# Altium PCB PC110.PcbDoc (part 10 of 24)
Units mm, origin at the board's own origin, x right, y up, seen from the top; angles counter-clockwise.
Board outline 150.05 x 107.35 mm, 10 copper layers (In2.Cu, F.Cu, B.Cu, In1.Cu, In3.Cu, In4.Cu, In5.Cu, In6.Cu, In7.Cu, In8.Cu); 936 components, 1434 nets, 4891 pads, 6088 vias.
Unrouted connection lines stored in the file: 2995.
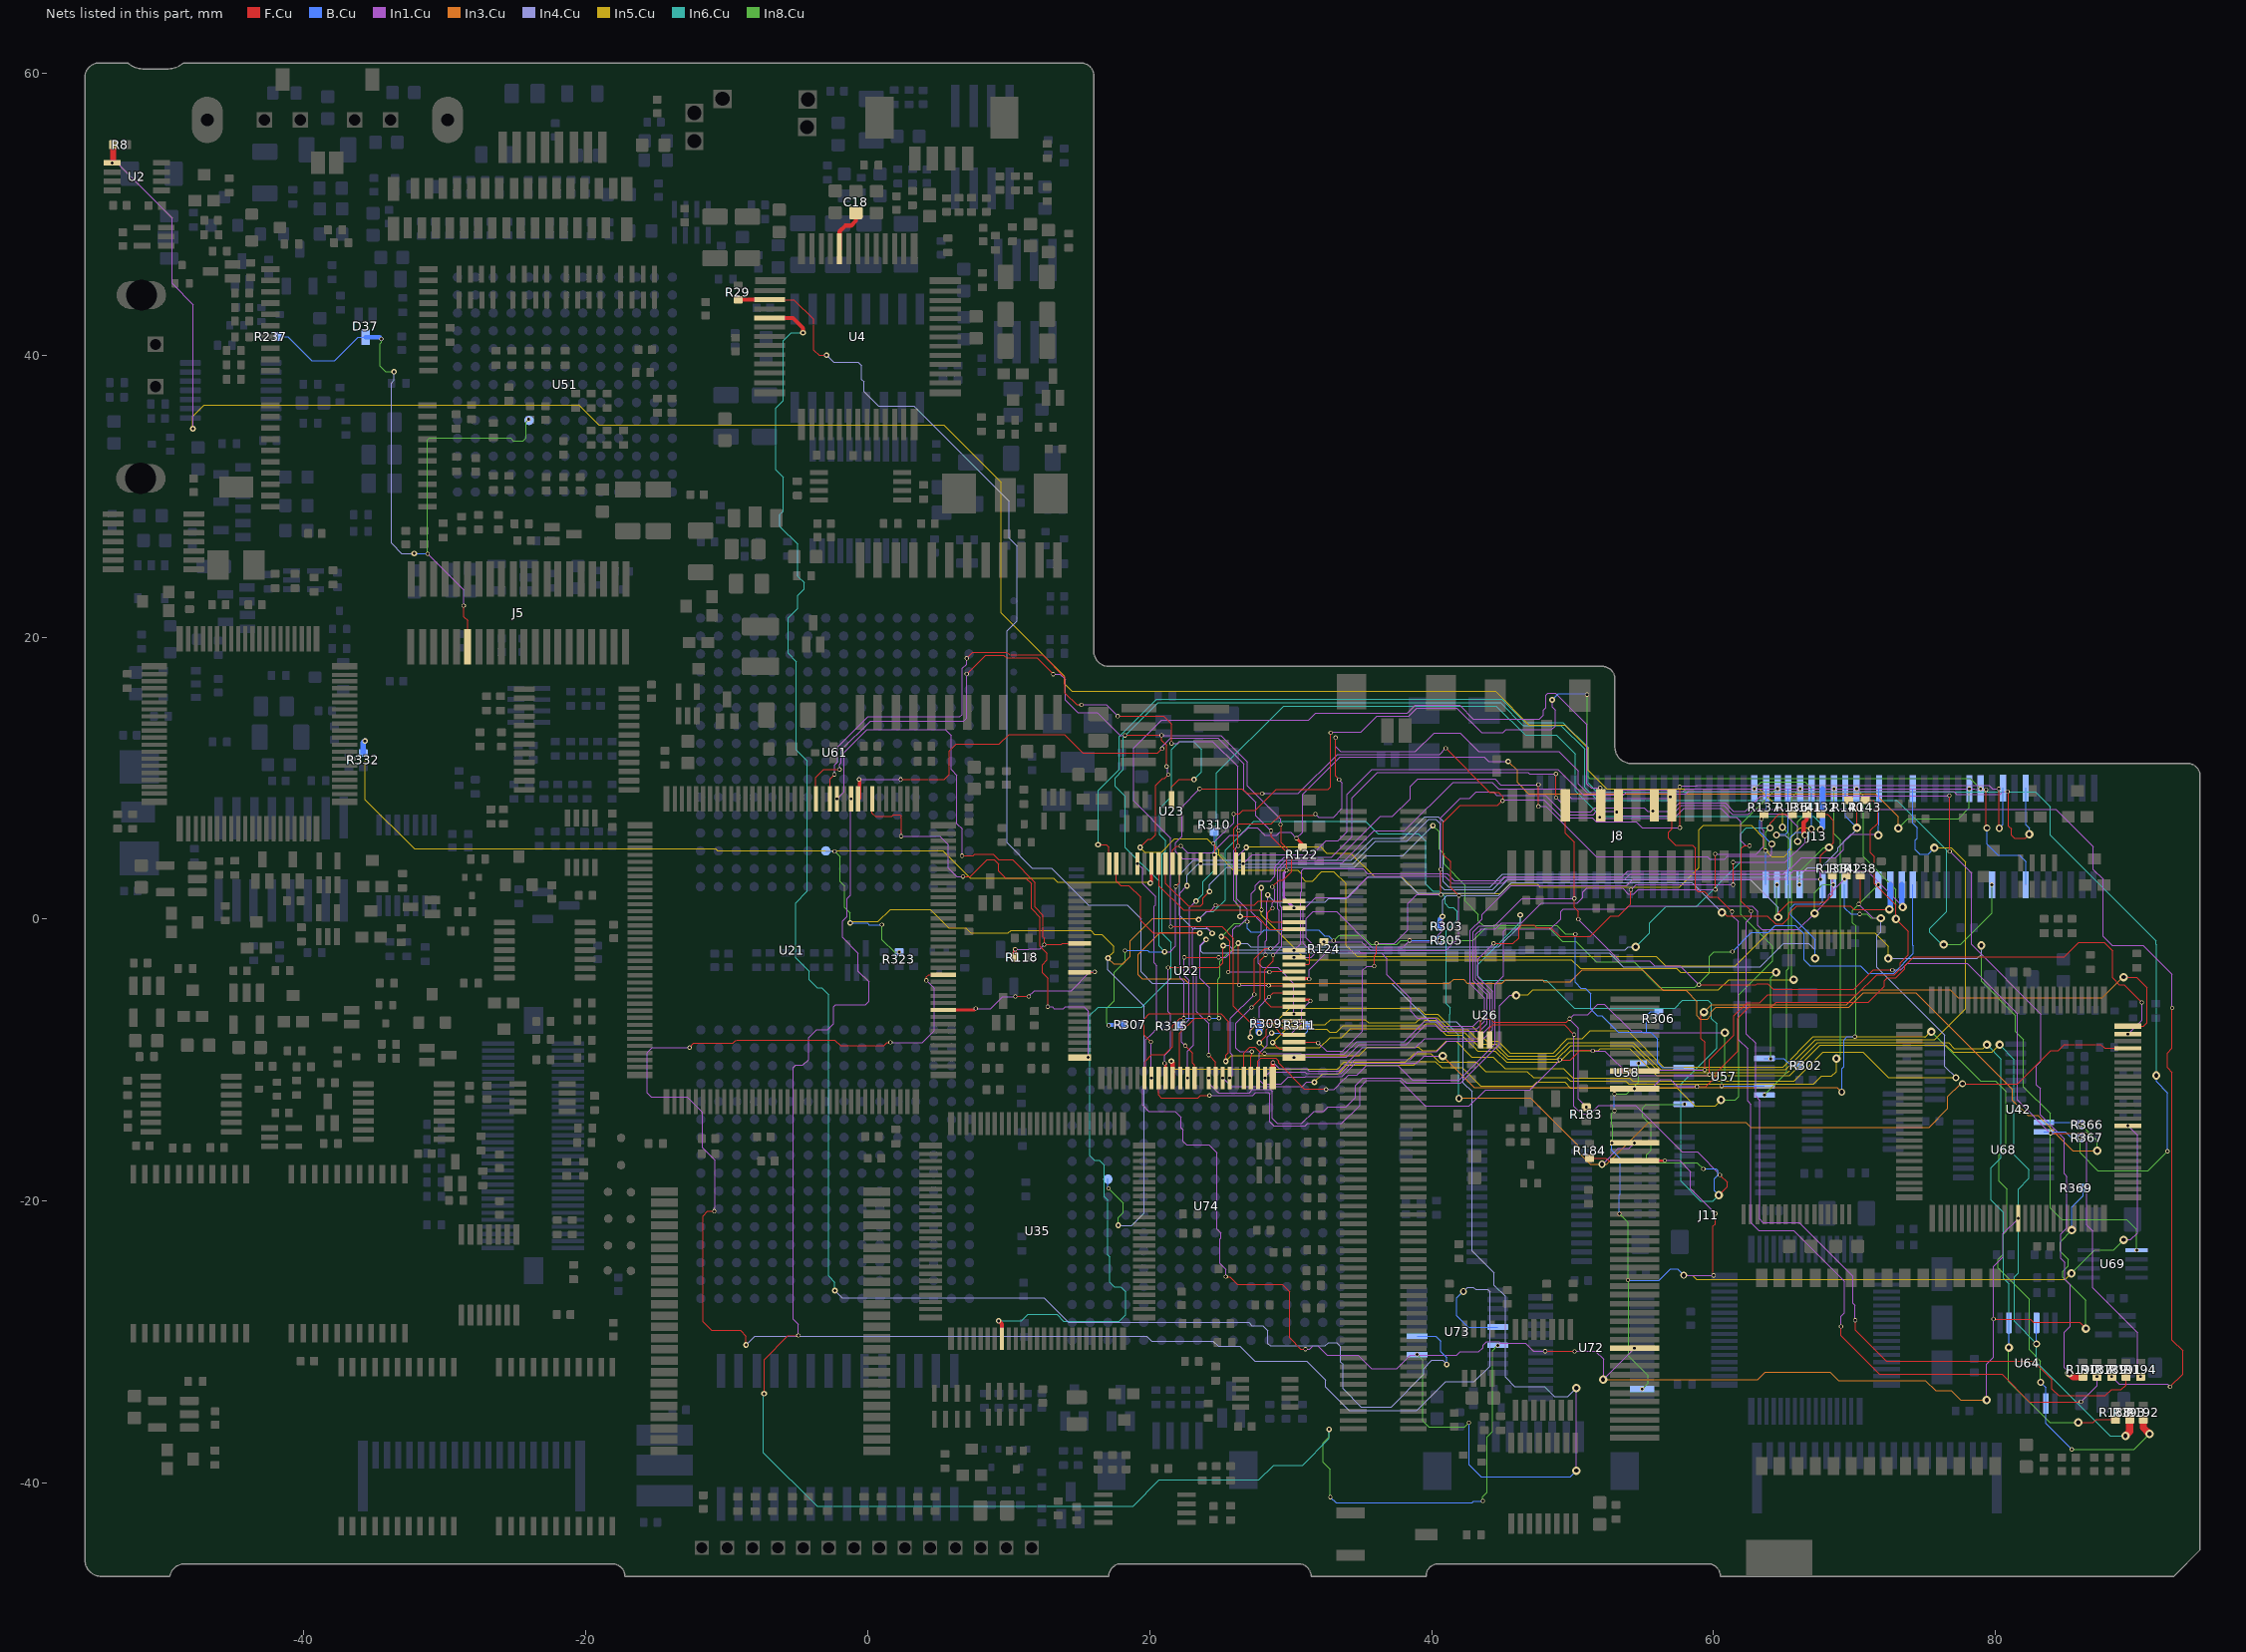
[diagram p17: the nets of this part, all layers, seen from the top]

## Via types
v1: diameter 0.3, hole 0.2, B.Cu to In8.Cu, tented both sides, 1934 vias
v2: diameter 0.4, hole 0.2, F.Cu to B.Cu, tented both sides, 1902 vias
v3: diameter 0.3, hole 0.2, F.Cu to In1.Cu, tented both sides, 1729 vias
v4: diameter 0.6, hole 0.3, F.Cu to B.Cu, tented both sides, 354 vias
v5: diameter 0.5, hole 0.3, F.Cu to B.Cu, tented both sides, 136 vias
v6: diameter 0.4, hole 0.2, B.Cu to In8.Cu, tented both sides, 12 vias
v7: diameter 0.3, hole 0.2, F.Cu to B.Cu, tented both sides, 6 vias
v8: diameter 0.6, hole 0.2, F.Cu to B.Cu, tented both sides, 4 vias
v9: diameter 0.5, hole 0.2, B.Cu to In8.Cu, tented both sides, 3 vias
v10: diameter 0.5, hole 0.2, F.Cu to B.Cu, tented both sides, 2 vias
v11: diameter 0.4, hole 0.3, F.Cu to B.Cu, tented both sides, 2 vias
v12: diameter 0.3, hole 0.2, F.Cu to In4.Cu, tented both sides, 2 vias
v13: diameter 0.6, hole 0.3, B.Cu to In8.Cu, tented both sides, 1 vias
v14: diameter 0.3, hole 0.2, F.Cu to In3.Cu, tented both sides, 1 vias

## Nets (pads, with @x,y where several pads share a name; then routed paths per layer and width w, separated by ;. In a path a pad name is that pad's centre, name@x,y a point inside that pad or via, vN(x,y) a via of type N, cw(c..) or ccw(c..) an arc to the next point about the centre after c; other vN are vias at no path point) (continued)
ESS_IRQ1: R29.1 U4.16 U73.13 | length 149.4
  F.Cu w0.08: U4.16@-6.95,43.94 -5.23,43.94 -3.83,42.54 -3.83,40.37 -3.46,40 v2(-2.92,40)
  F.Cu w0.3: R29.1@-9.2,43.94 U4.16@-6.95,43.94
  In1.Cu w0.08: v4(50.26,-33.26) 50.27,-33.27 v4(50.27,-39.11)
  In4.Cu w0.08: v2(-2.92,40) -2.43,39.51 -0.68,39.51 -0.43,39.26 -0.43,38.28 -0.27,38.12 -0.27,37.42 0.75,36.4 3.27,36.4 10.04,29.63 10.04,27.03 10.61,26.46 10.61,21.17 9.9,20.46 9.9,5.41 11.67,3.64 13.04,3.64 15.66,1.02 18.39,1.02 19.38,0.03 19.38,-3.74 20.18,-4.54 20.57,-4.54 20.575,-4.535 37.135,-4.535 39.87,-7.27 41.75,-7.27 42.25,-7.77 42.25,-11.6 42.88,-12.23 42.88,-23.54 44.44,-25.1 44.44,-25.96 45.23,-26.75 45.23,-32.49 45.895,-33.155 48.005,-33.155 48.72,-33.87 49.65,-33.87 v4(50.26,-33.26)
  In8.Cu w0.08: v1(38.967,-30.875) 39.38,-31.287 39.38,-35.6 39.78,-36 42.36,-36 v1(42.65,-35.71)
  B.Cu w0.08: v1(42.65,-35.71) 42.65,-38.69 43.51,-39.55 49.83,-39.55 v4(50.27,-39.11)
ESS_IRQ1_Buf: U21.118 U73.7 | length 125.4
  F.Cu w0.08: v2(-7.35,-33.65) -7.35,-31.23 -5.67,-29.55 -4.94,-29.55 v3(-4.92,-29.53)
  In1.Cu w0.08: v3(-4.92,-29.53) -4.92,-28.74 -5.27,-28.39 -5.27,-10.515 -5.11,-10.355 -4.595,-10.355 -4.18,-9.94 -4.18,-8.39 -3.63,-7.84 -2.85,-7.84 -2.43,-7.42 -2.43,-6.2 -2.29,-6.06 -0.15,-6.06 0.08,-5.83 0.08,-4.45 -0.67,-3.7 -0.67,-2.42 -1.79,-1.3 -1.79,-0.13 -1.48,0.18 -1.48,1.47 -1.22,1.73 -1.22,8.39 ; v3(-1.18,8.535) -1.22,8.495 -1.22,8.39 ; v3@-1.17,8.47 -1.22,8.42 -1.22,8.39
  In6.Cu w0.08: v2(-7.35,-33.65) -7.39,-33.69 -7.39,-37.84 -3.6,-41.63 18.82,-41.63 20.68,-39.77 27.75,-39.77 28.8,-38.72 30.84,-38.72 32.72,-36.84 v2(32.72,-36.18)
  In8.Cu w0.08: v2(32.72,-36.18) 32.72,-36.72 32.3,-37.14 32.3,-38.52 32.81,-39.03 v1(32.81,-40.99) ; v1(43.63,-41.27) 43.63,-40.97 43.94,-40.66 43.94,-36.71 44.32,-36.33 44.32,-30.598 v1(44.692,-30.225)
  B.Cu w0.08: v1(32.81,-40.99) 33.22,-41.4 42.86,-41.4 42.99,-41.27 v1(43.63,-41.27)
ESS_IRQ2: U4.18 U73.15 | length 130.5
  F.Cu w0.3: U4.18@-6.95,42.64 -5.31,42.64 -4.59,41.92 v2(-4.59,41.6)
  In4.Cu w0.08: v2(-2.33,-26.34) -1.82,-26.85 12.5,-26.85 14.25,-28.6 27.04,-28.6 27.26,-28.82 28.01,-28.82 28.38,-29.19 28.38,-30.09 28.54,-30.25 32.46,-30.25 32.68,-30.03 33.27,-30.03 33.55,-30.31 33.55,-31.41 33.71,-31.57 33.71,-33.3 35,-34.59 37.13,-34.59 39.45,-32.27 39.45,-31.86 40.02,-31.29 40.78,-31.29 v2(41.07,-31.58)
  In6.Cu w0.08: v2(-4.59,41.6) -5.44,41.6 -6,41.04 -6,36.77 -6.53,36.24 -6.53,31.87 -5.99,31.33 -5.99,28.94 -6.22,28.71 -6.22,27.85 -4.96,26.59 -4.96,24.32 -4.51,23.87 -4.51,23.41 -4.96,22.96 -4.96,22.05 -5.65,21.36 -5.65,18.86 -5.06,18.27 -5.06,11.99 -4.29,11.22 -4.29,1.98 -5.11,1.16 -5.11,-2.73 -4.16,-3.68 -4.16,-4.31 -3.6,-4.87 -3.26,-4.87 -2.78,-5.35 -2.78,-25.31 -2.33,-25.76 v2(-2.33,-26.34)
  B.Cu w0.08: U73.15@38.967,-29.575 40.285,-29.575 40.65,-29.94 40.65,-30.68 41.07,-31.1 v2(41.07,-31.58)
ESS_IRQ2_Buf: U21.87 U73.5 | length 123.4
  F.Cu w0.08: v3(-12.64,-9.1) -12.34,-8.8 -9.57,-8.8 -9.39,-8.62 -9.35,-8.62 -9.29,-8.56 -2.33,-8.56 -1.94,-8.95 1.17,-8.95 1.38,-8.74 v3(1.61,-8.74) ; v3(-10.89,-20.71) -11.35,-20.71 -11.68,-21.04 -11.68,-28.55 -11.08,-29.15 -9.04,-29.15 -8.63,-29.56 v2(-8.63,-30.2) ; v3(4.16,-4.34) 4.16,-4.1 4.32,-3.94 U21.87@5.37,-3.94
  In1.Cu w0.08: v3(-12.64,-9.1) -12.65,-9.09 -15.29,-9.09 -15.65,-9.45 -15.65,-12.31 -15.37,-12.59 -12.81,-12.59 -11.71,-13.69 -11.71,-16.22 -10.82,-17.11 -10.82,-20.41 -10.89,-20.48 v3(-10.89,-20.71) ; v3(1.61,-8.74) 3.89,-8.74 4.72,-7.91 4.72,-4.9 v3(4.16,-4.34)
  In4.Cu w0.08: v2(-8.63,-30.2) -8,-29.57 19.78,-29.57 20.15,-29.94 24.5,-29.94 24.86,-30.3 26.4,-30.3 27.46,-31.36 31.15,-31.36 32.48,-32.69 32.48,-33.2 34.135,-34.855 38.965,-34.855 41.01,-32.81 43.02,-32.81 44.14,-31.69 44.14,-26.43 43.98,-26.27 43.11,-26.27 42.95,-26.11 42.54,-26.11 v5(42.25,-26.4)
  B.Cu w0.08: v5(42.25,-26.4) 41.78,-26.87 41.78,-28.12 42.585,-28.925 U73.5@44.693,-28.925
ESS_Sound: C18.1 U4.9 | length 3.3
  F.Cu w0.3: U4.9@-2,47.54 -2,48.77 -1.58,49.19 -1.18,49.19 -0.84,49.53 C18.1@-0.84,50.085
F65_ENAVEE: D37.3 J5.26 R237.1 U51.E9 | length 52.4
  F.Cu w0.08: v3(-28.66,22.23) -28.66,21.46 -28.38,21.18 J5.26@-28.38,19.33
  In1.Cu w0.08: v2(-32.17,25.94) -31.24,25.94 -28.66,23.36 v3(-28.66,22.23)
  In4.Cu w0.08: v2(-33.6,38.83) -33.6,38.22 -33.79,38.03 -33.79,26.67 -33.06,25.94 v2(-32.17,25.94)
  In8.Cu w0.08: v1(-34.5,41.16) -34.5,40.92 -34.6,40.82 -34.6,39.24 -34.19,38.83 v2(-33.6,38.83) ; v1(-31.22,25.91) -31.22,33.98 -31.08,34.12 -25.34,34.12 -25.15,33.93 -24.46,33.93 -24.25,34.14 -24.25,35.26 v1(-24.06,35.45)
  B.Cu w0.08: R237.1@-41.82,41.33 -41.13,41.33 -39.42,39.62 -37.8,39.62 -36.14,41.28 D37.3@-35.61,41.28 ; v2(-32.17,25.94) -31.25,25.94 v1(-31.22,25.91)
  B.Cu w0.3: D37.3@-35.61,41.28 -34.62,41.28 v1(-34.5,41.16)
FCS_BVD1: J11.42 U42.50 | length 46.5
  F.Cu w0.08: v4(59.31,-6.58) 59.11,-6.78 59.11,-8.465 59.37,-8.725 v3(59.37,-10.69) ; v4(89.08,-4.11) 89.99,-4.11 90.75,-4.87 90.75,-7.34 90.515,-7.575 U42.50@89.385,-7.575
  In1.Cu w0.08: v3(54.39,-10.78) 54.48,-10.69 v3(59.37,-10.69)
  In3.Cu w0.08: v4(59.31,-6.58) 59.83,-6.06 69.43,-6.06 70.47,-5.02 76.77,-5.02 77.33,-5.58 87.56,-5.58 89.03,-4.11 v4(89.08,-4.11)
FCS_BVD2: J11.40 U42.49 | length 48.1
  F.Cu w0.08: v3(58.82,-11.87) 59.45,-11.87 60.175,-11.145 60.175,-10.895 61.73,-9.34 61.73,-7.02 62.54,-6.21 64.13,-6.21 64.45,-5.89 70.98,-5.89 72.12,-4.75 72.12,-4.35 72.32,-4.15 72.93,-4.15 73.56,-3.52 73.56,-3.31 74.2,-2.67 84.87,-2.67 85.89,-1.65 87.7,-1.65 88.3,-2.25 88.3,-4.17 88.77,-4.64 89.11,-4.64 v3(90.38,-5.91)
  In1.Cu w0.08: v3(54.39,-12.03) 55.56,-12.03 56.23,-11.36 56.93,-11.36 57.44,-11.87 v3(58.82,-11.87) ; v3(89.385,-8.15) 90.38,-7.155 v3(90.38,-5.91)
FCS_IOCHRDY: J11.34 R323.2 U22.98 U42.47 U61.H14 U74.K3 | length 172.6
  F.Cu w0.08: v3(24.69,0.99) 27.42,0.99 27.72,1.29 U22.98@30.23,1.29 ; v5(77.66,-11.67) 81.57,-11.67 83.91,-9.33 84.44,-9.33 84.88,-8.89 87.47,-8.89 87.73,-9.15 U42.47@89.385,-9.15
  In1.Cu w0.08: v2(23.47,-0.03) 23.48,-0.03 24.07,0.56 24.26,0.56 v3(24.69,0.99) ; v5(52.08,-17.38) 52.12,-17.38 53.24,-16.26 54.01,-16.26 v3(54.39,-15.88)
  In3.Cu w0.08: v2(17.04,-2.76) 17.44,-3.16 18.1,-3.16 18.63,-2.63 18.63,-1.53 20.22,0.06 23.22,0.06 23.31,-0.03 v2(23.47,-0.03) ; v5(41.93,-12.71) 41.97,-12.67 47.02,-12.67 50.51,-16.16 50.51,-16.63 51.26,-17.38 v5(52.08,-17.38) 52.43,-17.38 55.4,-14.41 62.3,-14.41 62.64,-14.75 75.29,-14.75 76.61,-13.43 76.61,-12.58 77.52,-11.67 v5(77.66,-11.67)
  In4.Cu w0.08: v2(17.04,-2.76) 17.04,-3.6 19.6,-6.16 19.6,-20.84 18.73,-21.71 v2(17.77,-21.71)
  In5.Cu w0.08: v2(-1.24,-0.27) -1.14,-0.17 0.74,-0.17 1.61,0.7 4.45,0.7 5.76,-0.61 6.94,-0.61 7.32,-0.99 9.97,-0.99 10.17,-0.79 15.81,-0.79 16.09,-1.07 16.59,-1.07 17.44,-1.92 17.44,-2.32 17.04,-2.72 v2(17.04,-2.76)
  In6.Cu w0.08: v2(23.47,-0.03) 24.03,0.53 24.52,0.53 25.36,1.37 25.36,4.91 27.4,6.95 35.32,6.95 36.19,6.08 39.045,6.08 39.59,5.535 39.59,2.48 40.07,2 40.525,2 40.95,1.575 40.95,1.1 41.21,0.84 41.52,0.84 41.82,0.54 41.82,-0.07 41.05,-0.84 41.05,-6 41.31,-6.26 41.31,-6.69 41.27,-6.73 41.27,-7.57 41.93,-8.23 v5(41.93,-12.71)
  In8.Cu w0.08: v1(-2.35,4.81) -1.96,4.42 -1.96,2.67 -1.63,2.34 -1.63,0.82 -1.24,0.43 v2(-1.24,-0.27) ; v1(1.005,-0.391) 1.005,-1.455 1.88,-2.33 v1(2.23,-2.33) ; v1(17.08,-19.09) 18.12,-20.13 18.12,-20.81 17.77,-21.16 v2(17.77,-21.71)
  B.Cu w0.08: U61.H14@-2.98,4.84 -2.38,4.84 v1(-2.35,4.81) ; v2(-1.24,-0.27) -0.02,-0.27 0.101,-0.391 v1(1.005,-0.391) ; U74.K3@17.03,-18.42 17.03,-19.04 v1(17.08,-19.09)
FCS_RESET: J11.32 R184.1 U42.36 U58.4 U72.11 | length 89.7
  F.Cu w0.08: R184.1@51.22,-16.98 51.26,-16.94 52.36,-16.94 52.55,-17.13 J11.32@54.39,-17.13 ; v3(60.01,-25.26) 59.96,-25.21 59.96,-21.78 60.13,-21.61 v3(60.13,-20.88)
  F.Cu w0.2: R184.1@51.21,-16.99 R184.1@51.22,-16.98 ; J11.32@54.39,-17.13 56.51,-17.13 v3(56.53,-17.11)
  In1.Cu w0.08: v3(56.53,-17.11) 57.57,-17.11 58.36,-17.9 58.36,-19.11 v3(60.13,-20.88) ; v5(57.88,-25.26) v3(60.01,-25.26) ; v4(89.09,-22.74) 89.1,-22.73 89.59,-22.73 90.07,-22.25 90.07,-15.34 89.385,-14.655 v3(89.385,-14.65)
  In5.Cu w0.08: v5(57.88,-25.26) 58.49,-25.26 58.77,-25.54 84.96,-25.54 v4(85.38,-25.12)
  In8.Cu w0.08: v1(52.79,-15.88) 52.79,-15.65 52.84,-15.6 52.84,-14.6 52.78,-14.54 52.78,-13.79 v1(52.97,-13.6) ; v1(52.96,-12.39) 53.82,-12.39 54.68,-11.53 v1(54.68,-10.22) ; v1(53.32,-20.89) 53.93,-21.5 v1(53.93,-25.6) 53.98,-25.65 53.98,-30.98 55.36,-32.36 55.36,-32.895 v1(54.93,-33.325) ; v4(85.38,-25.12) 87.05,-23.45 88.38,-23.45 v4(89.09,-22.74)
  B.Cu w0.08: v1(52.79,-15.88) 52.79,-16.4 53.39,-17 53.39,-19.5 53.32,-19.57 v1(53.32,-20.89) ; v1(52.96,-12.39) 52.96,-13.59 v1(52.97,-13.6) ; v1(53.93,-25.6) 56.14,-25.6 56.95,-24.79 57.43,-24.79 57.88,-25.24 v5(57.88,-25.26)
FDC_ACK#: J13.71 R136.1 U22.60 | length 63.8
  F.Cu w0.08: v3(21.3,-3.43) 24.88,-3.43 25.21,-3.1 v2(25.21,-1.87) ; v5(64,6.47) 64,6.81 64.62,7.43 R136.1@65.6,7.43
  F.Cu w0.2: v3(21.06,-10.22) 21.13,-10.29 U22.60@21.13,-11.26
  In1.Cu w0.08: v3(21.06,-10.22) 21.06,-9.63 21.48,-9.21 21.48,-6.74 21.3,-6.56 v3(21.3,-3.43)
  In4.Cu w0.08: v2(25.21,-1.87) 25.63,-1.87 25.94,-2.18 53.73,-2.18 53.94,-1.97 v4(54.47,-1.97)
  In6.Cu w0.08: v4(54.47,-1.97) 55.46,-0.98 55.46,-0.26 56.62,0.9 58.77,0.9 61.94,4.07 61.94,6.08 62.33,6.47 v5(64,6.47)
  In8.Cu w0.08: v1(63.69,4.86) 63.69,6.17 63.99,6.47 v5(64,6.47)
  B.Cu w0.08: J13.71@63.69,2.45 v1(63.69,4.86)
FDC_AUTOFD#: J13.73 R141.1 U22.74 | length 59.2
  F.Cu w0.08: v3(44.39,-1.71) 45.79,-1.71 46.19,-1.31 46.19,-0.65 46.42,-0.42 47.27,-0.42 47.42,-0.57 48.44,-0.57 49.09,-1.22 51.246,-1.22 52.686,0.22 53.26,0.22 54.13,1.09 v3(54.13,2.08) ; v3(61.39,2.45) v3(61.39,4.05)
  F.Cu w0.3: v5(66.48,5.96) 66.38,6.06 66.38,6.85 66.61,7.08 R141.1@66.61,7.43
  In1.Cu w0.08: v3(28.18,-11.26) 28.18,-11.16 28.51,-10.83 31.01,-10.83 31.12,-10.94 33.57,-10.94 34.56,-9.95 38.48,-9.95 38.84,-9.59 38.84,-9.56 39.02,-9.38 40.38,-9.38 41.11,-8.65 43.51,-8.65 44.31,-7.85 44.31,-5.12 43.3,-4.11 43.3,-2.8 v3(44.39,-1.71) ; v3(54.13,2.08) 54.5,2.45 v3(61.39,2.45) ; v3(61.39,4.05) 65.09,4.05 66.48,5.44 v5(66.48,5.96)
  B.Cu w0.08: J13.73@65.29,2.45 65.29,4.88 65.48,5.07 65.48,5.85 65.81,6.18 66.26,6.18 v5(66.48,5.96)
FDC_BUSY: J13.22 R143.2 U22.59 | length 90.6
  F.Cu w0.08: U22.59@20.63,-11.26 20.63,-12.48 20.82,-12.67 23.43,-12.67 23.6,-12.5 v3(24.24,-12.5) ; v3(49.09,-9.98) 49.84,-9.98 50.53,-9.29 51.38,-9.29 v3(51.43,-9.34) ; v3(59.7,-11.01) 59.7,-9.96 61.45,-8.21 61.45,-6.86 62.39,-5.92 63.27,-5.92 63.83,-5.36 70.14,-5.36 71.57,-3.93 72.83,-3.93 73.245,-3.515 73.245,-3.095 73.81,-2.53 73.81,-0.86 v4(72.94,0.01) 72.94,1.01 71.42,2.53 71.42,4.45 71.14,4.73 71.14,6.31 71.64,6.81 71.64,8.1 71.3,8.44 R143.2@70.76,8.44
  In1.Cu w0.08: v3(24.24,-12.5) 27.32,-12.5 27.53,-12.29 28.4,-12.29 28.51,-12.4 28.51,-14.37 28.81,-14.67 31.02,-14.67 31.2,-14.49 33.61,-14.49 34.91,-13.19 34.91,-11.92 35.38,-11.45 37.75,-11.45 39.55,-13.25 42.67,-13.25 43.82,-12.1 46.97,-12.1 v3(49.09,-9.98) ; v3(51.43,-9.34) 52.29,-9.34 54.05,-11.1 59.61,-11.1 v3(59.7,-11.01)
  In8.Cu w0.08: v1(70.14,9.25) 70.63,8.76 70.63,4.43 72.94,2.12 v4(72.94,0.01)
FDC_CLK: R332.2 U22.18 | length 64.6
  F.Cu w0.2: v2(20.04,2.56) 20.13,2.65 U22.18@20.13,3.94
  In5.Cu w0.08: v2(-35.66,12.64) -35.64,12.62 -35.64,8.48 -32.17,5.01 -10.78,5.01 -10.64,4.87 5.31,4.87 7.27,2.91 13.18,2.91 13.46,2.63 19.97,2.63 v2(20.04,2.56)
  B.Cu w0.4: R332.2@-35.79,11.79 -35.79,12.51 v2(-35.66,12.64)
FDC_CTS1#: J8.8 R191.1 U22.80 | length 147.1
  F.Cu w0.08: v3(21.5,-0.53) 25.12,-0.53 25.94,-1.35 25.94,-6.16 27.17,-7.39 29.02,-7.39 29.34,-7.71 U22.80@30.23,-7.71 ; v3(51.93,7.23) 51.93,8.02 J8.8@51.99,8.08 51.96,8.11 v3(51.96,9.31) ; v3(62.55,5.21) 62.16,5.21 61.97,5.02 61.97,1.26 v3(62.66,0.57) ; v3(70.05,-28.45) 70.05,-29.15 72.24,-31.34 82.67,-31.34 84,-32.67 84,-33.31 84.49,-33.8 87.79,-33.8 88.22,-33.37 88.91,-33.37 89.25,-33.03 R191.1@89.25,-32.445
  In1.Cu w0.08: v3(21.5,-0.53) 21.5,5.76 18.87,8.39 18.87,12.13 20.86,14.12 31.29,14.12 31.78,14.61 38.26,14.61 38.83,15.18 41.98,15.18 42.96,14.2 47.64,14.2 47.92,14.48 47.92,14.84 48.1,15.02 48.1,15.89 48.25,16.04 48.79,16.04 51.02,13.81 51.02,9.61 51.32,9.31 v3(51.96,9.31) ; v3(51.93,7.23) 52.01,7.15 57.2,7.15 57.9,7.85 60.53,7.85 61.14,7.24 61.61,7.24 61.94,6.91 61.94,5.56 62.29,5.21 v3(62.55,5.21) ; v3(62.66,0.57) 62.66,0.16 62.32,-0.18 62.32,-8.14 62.98,-8.8 62.98,-12.55 63.27,-12.84 63.27,-21.28 63.49,-21.5 66.07,-21.5 69.9,-25.33 69.9,-27.25 70.03,-27.38 70.03,-28.43 v3(70.05,-28.45)
FDC_CTS2#: J13.82 R303.2 U22.90 | length 54.8
  F.Cu w0.08: v4(60.59,0.47) 60.72,0.47 60.95,0.24 63.8,0.24 64.39,-0.35 64.9,-0.35 65.37,0.12 65.37,0.44 65.88,0.95 69.72,0.95 69.97,0.7 v4(72.47,0.7)
  In1.Cu w0.08: v3(30.23,-2.71) 31.47,-2.71 31.68,-2.5 31.68,-1.9 31.1,-1.32 31.1,0.04 31.6,0.54 33.24,0.54 35.81,-2.03 37.94,-2.03 38.36,-1.61 39.94,-1.61 40.77,-0.78 v2(40.77,0.19)
  In4.Cu w0.08: v2(40.77,0.19) 40.77,1.37 41.07,1.67 44.73,1.67 45.66,2.6 58.46,2.6 v4(60.59,0.47)
  B.Cu w0.3: R303.2@40.56,-0.51 40.56,-0.02 v2(40.77,0.19)
  B.Cu w0.4: v4(72.47,0.7) 72.54,0.77 J13.82@72.54,2.45
FDC_DACK#: R118.1 U21.120 U22.34 | length 36.8
  F.Cu w0.08: v3(6.69,4.5) 7.47,4.5 7.59,4.62 8.89,4.62 9.29,4.22 10.26,4.22 11.84,2.64 11.84,2.62 11.85,2.61 11.85,0.86 12.44,0.27 12.44,-1.25 12.52,-1.33 v3(12.52,-1.8) 13.73,-1.8 13.82,-1.71 U22.34@15.03,-1.71
  F.Cu w0.3: R118.1@10.43,-2.69 10.43,-2.17 v3(10.46,-2.14)
  In1.Cu w0.08: v3(-2.18,8.535) -1.69,9.025 -1.69,11.82 -0.06,13.45 5.5,13.45 5.92,13.03 5.92,10.61 6.32,10.21 6.32,6.77 6.69,6.4 v3(6.69,4.5) ; v3(10.46,-2.14) 11.42,-2.14 11.47,-2.09 12.23,-2.09 v3(12.52,-1.8)
FDC_DCD1#: J8.4 R187.1 U22.83 | length 110.4
  F.Cu w0.08: v3(28.75,-2.55) 28.75,-2.97 28.45,-3.27 28.45,-3.28 28.15,-3.58 28.15,-5.77 28.59,-6.21 U22.83@30.23,-6.21 ; v3(56.93,8.68) 56.93,8.19 J8.4@57.04,8.08 57.04,6.4 56.82,6.18 56.82,5.74 57.31,5.25 58.5,5.25 58.73,5.02 58.73,2.13 58.9,1.96 59.34,1.96 59.72,1.58 60.27,1.58 v3(61.31,0.54) ; v3(69.04,-28.89) 69.04,-29.54 71.77,-32.27 80.44,-32.27 82.4,-34.23 v3(86.05,-34.23)
  In1.Cu w0.08: v3(28.75,-2.55) 29.38,-1.92 29.38,0.82 29.27,0.93 29.27,3.52 29.76,4.01 33.67,4.01 35.92,6.26 38.07,6.26 41.53,9.72 44.29,9.72 44.75,9.26 49.24,9.26 49.92,8.58 56.83,8.58 v3(56.93,8.68) ; v3(61.31,0.54) 61.31,0.28 61.76,-0.17 61.76,-8.53 62.41,-9.18 62.41,-12.89 62.65,-13.13 62.65,-21.53 63.19,-22.07 65.68,-22.07 69.28,-25.67 69.28,-27.92 69.04,-28.16 v3(69.04,-28.89) ; v3(86.05,-34.23) 87.2,-33.08 v3(87.2,-32.445)
FDC_DCD2#: J13.17 R309.2 U22.85 | length 79.5
  F.Cu w0.08: v3(28.46,-5.51) 28.76,-5.21 U22.85@30.23,-5.21
  In1.Cu w0.08: v2(27.77,-8.06) 27.76,-8.05 27.76,-6.21 v3(28.46,-5.51)
  In5.Cu w0.08: v2(27.77,-8.06) 28.34,-7.49 32.46,-7.49 32.84,-7.11 35.27,-7.11 35.515,-7.355 38.885,-7.355 39.26,-6.98 40.4,-6.98 41.25,-7.83 42.56,-7.83 43.58,-8.85 44.58,-8.85 45.42,-9.69 48.78,-9.69 49.73,-8.74 54.31,-8.74 56.24,-10.67 65.12,-10.67 67.24,-8.55 75.7,-8.55 77.89,-6.36 77.89,4.04 76.84,5.09 75.69,5.09 v4(75.66,5.06)
  B.Cu w0.08: v2@27.75,-8.04 v2(27.77,-8.06) ; J13.17@74.14,9.25 74.14,6.8 74.44,6.5 74.44,5.74 74.3,5.6 74.3,4.92 74.61,4.61 75.21,4.61 v4(75.66,5.06)
  B.Cu w0.5: v2@27.75,-8.04 R309.2@27.75,-7.4
FDC_DIR#: J13.7 U22.5 | length 67.7
  F.Cu w0.08: v3(80.85,9.05) 80.93,8.97 80.93,6.61 81.13,6.41 81.13,5.95 81.33,5.75 82.11,5.75 v4(82.39,6.03)
  In1.Cu w0.08: v3(26.63,3.94) 27.27,4.58 31.53,4.58 32.53,5.58 33.37,5.58 34,6.21 34,8.86 35.76,10.62 48.97,10.62 50.76,8.83 53.63,8.83 53.8,9 57.14,9 57.26,8.88 58.03,8.88 58.23,9.08 77.03,9.08 77.24,8.87 80.31,8.87 80.49,9.05 v3(80.85,9.05)
  B.Cu w0.08: J13.7@82.14,9.3 82.14,6.71 82.39,6.46 v4(82.39,6.03)
FDC_DRATE0: R302.2 U22.17 U57.2 | length 60.1
  F.Cu w0.08: U22.17@20.68,3.89 20.68,2.36 22.4,0.64 27.92,0.64 v3(27.94,0.66)
  In1.Cu w0.08: v2(27.92,2.23) 27.94,2.21 v3(27.94,0.66)
  In5.Cu w0.08: v2(27.92,2.23) 27.92,0.31 31.1,-2.87 49.92,-2.87 50.54,-3.49 57.38,-3.49 57.64,-3.75 64.41,-3.75 v4(64.43,-3.77)
  In8.Cu w0.08: v1(64.05,-9.9) 64.05,-4.15 v4(64.43,-3.77)
  B.Cu w0.08: U57.2@63.603,-9.87 64.98,-9.87 65.5,-10.39 R302.2@66.04,-10.39
FDC_DRATE1: R306.2 U22.16 U57.12 | length 56.7
  F.Cu w0.08: U22.16@21.13,3.94 21.13,2.54 22.74,0.93 23.61,0.93 23.78,1.1 23.78,1.49 v2(24.25,1.96)
  In4.Cu w0.08: v2(24.25,1.96) 24.25,2.46 25.49,3.7 34.53,3.7 35.34,4.51 37.96,4.51 v2(40.09,6.64)
  In8.Cu w0.08: v2(40.09,6.64) 40.54,6.19 40.54,4.95 40.88,4.61 40.88,3.89 42.37,2.4 42.37,1.29 43.31,0.35 43.31,-0.12 43.64,-0.45 48.89,-0.45 49.5,-1.06 v1(50.19,-1.06)
  B.Cu w0.08: v1(50.19,-1.06) 50.19,-4.49 50.59,-4.89 50.9,-4.89 51.29,-5.28 51.29,-6.39 51.75,-6.85 52.06,-6.85 53.22,-8.01 55.26,-8.01 ; R306.2@56.1,-6.55 55.52,-6.55 55.26,-6.81 55.26,-8.01 ; U57.12@57.877,-10.52 56.35,-10.52 56.03,-10.2 56.03,-8.52 55.52,-8.01 55.26,-8.01
FDC_DS3: U21.123 U22.95 U69.1 | length 166.1
  F.Cu w0.08: U21.123@-3.68,8.535 -3.68,10.07 -3.13,10.62 v3(-2,10.62) ; v3(7.02,17.39) 8.36,18.73 9.65,18.73 9.85,18.53 12.01,18.53 v3(13.16,17.38) ; v3(18.245,13.035) 18.26,13.05 20.84,13.05 v3(20.85,13.04) 20.85,12.69 21.2,12.34 v3(21.2,10.83) ; v2(19.33,5.09) 19.33,5.1 19.9,5.67 20.12,5.67 20.43,5.98 20.43,9.49 20.92,9.98 21.05,9.98 v3(21.32,10.25) ; v3(28.69,2.3) 29.18,2.79 29.47,2.79 30.07,3.39 30.07,4.7 29.345,5.425 29.345,6.655 v3(29.28,6.72) ; v3(28.71,0.78) 28.69,0.78 28.385,0.475 28.385,0.025 28.62,-0.21 U22.95@30.23,-0.21
  In1.Cu w0.08: v3(-2,10.62) -2,10.99 -1.88,11.11 -1.88,11.99 0.19,14.06 6.82,14.06 7.02,14.26 v3(7.02,17.39) ; v3(13.16,17.38) 13.64,17.38 14.01,17.01 14.01,15.55 14.92,14.64 16.29,14.64 17.895,13.035 v3(18.245,13.035) ; v3(20.85,13.04) 25.05,13.04 26.93,11.16 26.93,9.44 29.28,7.09 v3(29.28,6.72) ; v3(21.2,10.83) 21.26,10.77 21.26,10.31 v3(21.32,10.25) ; v3(28.69,2.3) 28.88,2.11 28.88,1.33 28.71,1.16 v3(28.71,0.78)
  In4.Cu w0.08: v4(72.38,-2.79) 78.69,-2.79 78.99,-2.49 v4(78.99,-1.85)
  In5.Cu w0.08: v2(19.33,5.09) 19.65,4.77 20.84,4.77 21.78,5.71 24.07,5.71 24.9,4.88 24.9,4.53 25.95,3.48 30.49,3.48 30.78,3.19 30.78,2.97 31.03,2.72 31.56,2.72 32.21,3.37 33.06,3.37 33.92,2.51 33.92,-1.86 34.71,-2.65 55.92,-2.65 56.58,-3.31 61.55,-3.31 63.87,-0.99 71.45,-0.99 72.38,-1.92 v4(72.38,-2.79)
  In8.Cu w0.08: v4(78.99,-1.85) 78.99,-4.4 81.42,-6.83 81.42,-7.98 81.99,-8.55 81.99,-11.9 83.87,-13.78 83.87,-20.49 84.69,-21.31 89.31,-21.31 90,-22 90,-23.465 v1(90.01,-23.475)
FDC_DSKCHG#: J13.12 R122.2 U22.15 | length 68.8
  F.Cu w0.08: U22.15@21.63,3.94 21.63,4.91 21.91,5.19 v3(22.21,5.19)
  F.Cu w0.2: v3(30.41,5.74) 30.83,5.32 R122.2@30.83,5.1
  In1.Cu w0.08: v3(22.21,5.19) 22.69,4.71 24.44,4.71 25.68,5.95 26.45,5.95 26.99,6.49 27.63,6.49 28.16,5.96 29.03,5.96 29.23,6.16 29.99,6.16 v3(30.41,5.74) 30.85,6.18 30.85,8.86 33.49,11.5 43.72,11.5 44.03,11.19 v2(45.43,11.19)
  In3.Cu w0.08: v2(45.43,11.19) 46.08,10.54 46.08,9.69 46.87,8.9 71.47,8.9 73.11,7.26 v4(73.11,6.46)
  In8.Cu w0.08: v4(73.11,6.46) 73.78,7.13 77.38,7.13 78.14,7.89 v1(78.14,9.25)
FDC_DSR1: J8.7 R189.1 U22.78 | length 122.8
  F.Cu w0.08: U22.78@30.23,-8.71 31.88,-8.71 v3(31.95,-8.78) ; v3(35.93,-3.33) 35.93,-2.6 36.09,-2.44 v3(36.09,-1.72) ; v3(40.64,3.54) 40.64,1.77 v3(40.67,1.74) ; v3(53.13,7.61) 53.13,7.97 J8.7@53.24,8.08 ; v3(92.38,-33.16) 93.29,-32.25 93.29,-30.61 92.53,-29.85 92.53,-10.86 92.19,-10.52 92.19,-9.48 92.53,-9.14 v3(92.53,-6.3)
  In1.Cu w0.08: v3(31.95,-8.78) 32.54,-9.37 33.67,-9.37 35.09,-7.95 35.09,-3.64 35.4,-3.33 v3(35.93,-3.33) ; v3(36.09,-1.72) 37.34,-1.72 38.3,-0.76 38.3,1.1 38.94,1.74 v3(40.67,1.74) ; v3(40.64,3.54) 40.64,7.18 42.02,8.56 42.68,8.56 43.14,9.02 44.39,9.02 44.61,8.8 48.06,8.8 49.44,7.42 51.46,7.42 51.68,7.64 53.1,7.64 v3(53.13,7.61) 53.4,7.34 56.98,7.34 57.71,8.07 60.72,8.07 61.34,7.45 62.47,7.45 62.83,7.81 84.27,7.81 86.93,5.15 86.93,3.52 87.62,2.83 87.62,-1.21 88.26,-1.85 90.46,-1.85 92.53,-3.92 v3(92.53,-6.3) ; v3(88.24,-32.445) 88.755,-32.96 92.18,-32.96 v3(92.38,-33.16)
FDC_DSR2#: J13.84 R305.2 U22.88 | length 71.2
  F.Cu w0.08: v2(25.08,-1.24) 25.36,-1.24 25.69,-1.57 25.69,-3.62 v3(25.57,-3.74) ; v3(28.49,-3.74) 28.52,-3.71 U22.88@30.23,-3.71
  In1.Cu w0.08: v3(25.57,-3.74) v3(28.49,-3.74)
  In8.Cu w0.08: v2(25.08,-1.24) 26.01,-0.31 26.58,-0.31 26.71,-0.18 v1(26.92,-0.18) ; v1(33.04,-1.53) 33.42,-1.15 35.05,-1.15 35.68,-1.78 37.55,-1.78 37.83,-1.5 v1(38.44,-1.5) ; v1(40.56,-1.5) 42.95,-1.5 43.83,-0.62 48.31,-0.62 49.28,-1.59 50.24,-1.59 51.68,-3.03 54.36,-3.03 56.14,-4.81 58.69,-4.81 59.69,-3.81 59.69,-2.62 60.01,-2.3 61.32,-2.3 v1(61.325,-2.305)
  B.Cu w0.08: v1(26.92,-0.18) 26.92,-0.65 27.19,-0.92 27.98,-0.92 28.14,-0.76 31.98,-0.76 32.41,-1.19 32.7,-1.19 v1(33.04,-1.53) ; v1(38.44,-1.5) v1(40.56,-1.5) ; v1(61.325,-2.305) 62.68,-0.95 63.86,-0.95 64.38,-0.43 65.8,-0.43 66.42,-1.05 66.42,-2.88 66.83,-3.29 70.42,-3.29 70.95,-3.82 72.77,-3.82 74.18,-2.41 74.18,-1.9 74.14,-1.86 J13.84@74.14,2.45
FDC_DTR1#: R192.1 U22.81 U64.9 | length 100.2
  F.Cu w0.08: v3(27.39,-7.11) 28.99,-7.11 29.09,-7.21 U22.81@30.23,-7.21
  F.Cu w0.5: R192.1@90.48,-35.485 90.48,-36.07 v4(90.92,-36.51)
  In1.Cu w0.08: v2(27.15,-8.37) 27.15,-7.84 27.39,-7.6 v3(27.39,-7.11)
  In5.Cu w0.08: v2(27.15,-8.37) 27.15,-7.89 27.88,-7.16 29.07,-7.16 29.93,-6.3 39.08,-6.3 39.53,-6.75 40.43,-6.75 41.27,-7.59 42.86,-7.59 43.9,-8.63 44.72,-8.63 45.57,-9.48 48.64,-9.48 49.64,-8.48 50.68,-8.48 51.24,-7.92 53.89,-7.92 56.45,-10.48 64.92,-10.48 67.06,-8.34 74.95,-8.34 74.96,-8.35 75.02,-8.35 75.38,-7.99 v4(75.45,-7.99)
  In8.Cu w0.08: v4(75.45,-7.99) 78.95,-11.49 80.01,-11.49 80.73,-12.21 80.73,-16.22 80.25,-16.7 80.25,-18.59 80.8,-19.14 80.8,-22.09 80.56,-22.33 80.56,-23.73 80.16,-24.13 80.16,-24.73 82.4,-26.97 82.4,-30.54 83.19,-31.33 v5(83.19,-32.85) ; v1(85.41,-37.6) 89.83,-37.6 v4(90.92,-36.51)
  B.Cu w0.08: v5(83.19,-32.85) 83.56,-33.22 U64.9@83.56,-34.353 83.56,-35.75 v1(85.41,-37.6)
FDC_DTR2#: J13.20 U22.91 | length 52.2
  In1.Cu w0.08: v3(30.23,-2.21) 30.7,-1.74 30.7,1.88 30.79,1.97 30.79,3.44 30.92,3.57 35.12,3.57 35.46,3.23 41.1,3.23 41.59,2.74 44.83,2.74 45.12,3.03 53.5,3.03 53.89,3.42 65.28,3.42 66.24,4.38 68.66,4.38 69.21,4.93 69.21,5.48 69.75,6.02 71.61,6.02 v4(71.68,5.95)
  B.Cu w0.08: v4(71.68,5.95) 71.68,6.59 71.74,6.65 J13.20@71.74,9.25
FDC_ERROR#: J13.77 R142.1 U22.73 | length 61.6
  F.Cu w0.08: U22.73@27.68,-11.26 27.68,-10.05 27.87,-9.86 28.94,-9.86 29.15,-10.07 29.15,-10.21 30.97,-12.03 32.47,-12.03 v3(32.51,-12.07)
  In1.Cu w0.08: v3(32.51,-12.07) 33.08,-12.07 33.435,-11.715 33.435,-11.695 34.09,-11.04 34.7,-11.04 35.37,-10.37 37.59,-10.37 38.62,-11.4 41.95,-11.4 44.49,-8.86 44.49,-4.63 45.09,-4.03 45.09,-0.88 45.27,-0.7 48.44,-0.7 49.15,0.01 49.15,0.54 49.35,0.74 53.77,0.74 53.96,0.93 62.76,0.93 63.13,0.56 63.13,-0.45 63.41,-0.73 66.01,-0.73 v4(67.16,0.42) 68.17,1.43 68.17,1.72 v3(69.29,2.84)
  In8.Cu w0.08: v4(67.16,0.42) 67.16,1.89 67.72,2.45 v1(68.49,2.45)
  B.Cu w0.08: v1(68.49,2.45) J13.77@68.49,3.27
FDC_FDRQ: U21.115 U22.50 | length 34.6
  F.Cu w0.08: U21.115@0.32,8.535 0.32,7.52 0.55,7.29 1.73,7.29 1.84,7.4 2.27,7.4 2.38,7.29 v3(2.38,5.88) ; v3(6.76,3.03) 7.28,3.03 8.46,4.21 8.98,4.21 9.3,3.89 9.3,3.4 9.78,2.92 11.2,2.92 11.61,2.51 11.61,0.76 12.23,0.14 12.23,-1.93 12.73,-2.43 12.73,-2.89 12.38,-3.24 12.38,-3.8 12.77,-4.19 v3(12.77,-6.21) ; U22.50@15.03,-9.81 15.05,-9.79 v3(15.64,-9.79) 15.11,-9.79 U22.50@15.08,-9.76
  In1.Cu w0.08: v3(2.38,5.88) 5.13,5.88 5.72,5.29 5.72,3.62 6.31,3.03 v3(6.76,3.03) ; v3(12.77,-6.21) 13.09,-6.21 13.22,-6.34 13.88,-6.34 14.02,-6.2 15.32,-6.2 15.64,-6.52 v3(15.64,-9.79)
FDC_FINTR: U21.82 U22.38 | length 12.9
  F.Cu w0.08: v3(10.47,-5.49) 10.48,-5.48 v3(11.42,-5.48) ; U22.38@15.03,-3.76 16.07,-3.76 v3(16.1,-3.73)
  F.Cu w0.2: U21.82@5.37,-6.44 7.55,-6.44 v3(7.66,-6.33)
  In1.Cu w0.08: v3(7.66,-6.33) 8.73,-6.33 9.57,-5.49 v3(10.47,-5.49) ; v3(11.42,-5.48) 11.42,-5.47 11.83,-5.06 14.43,-5.06 15.76,-3.73 v3(16.1,-3.73)
FDC_HDCS0#: R366.2 U22.23 U68.1 | length 98.2
  F.Cu w0.08: U22.23@17.63,3.94 17.63,2.72 17.96,2.39 18.53,2.39 19.35,1.57 19.35,-0.09 20.25,-0.99 v2(23.55,-0.99)
  In3.Cu w0.08: v2(23.55,-0.99) 23.49,-0.93 20.75,-0.93 19.17,-2.51 19.17,-3.94 19.46,-4.23 22.44,-4.23 22.77,-4.56 41.26,-4.56 41.55,-4.27 42.27,-4.27 42.53,-4.53 45.01,-4.53 45.23,-4.31 47.86,-4.31 47.98,-4.43 49.845,-4.43 50.685,-3.59 54.97,-3.59 56.43,-5.05 57.62,-5.05 57.625,-5.055 58.025,-5.055 58.81,-5.84 58.81,-6.85 59.04,-7.08 59.55,-7.08 59.825,-6.805 59.825,-6.595 60.17,-6.25 69.59,-6.25 70.62,-5.22 74.34,-5.22 81.21,-12.09 81.21,-12.85 82.29,-13.93 82.99,-13.93 85.48,-16.42 v4(87.21,-16.42)
  In8.Cu w0.08: v1(86,-14.57) 86.08,-14.57 87.21,-15.7 v4(87.21,-16.42)
  B.Cu w0.08: U68.1@83.43,-14.42 85.68,-14.42 85.83,-14.57 v1(86,-14.57)
FDC_HDCS1#: R367.2 U22.24 U68.2 | length 121.1
  F.Cu w0.08: v2(16.34,5.29) 16.92,5.29 17.1,5.11 17.1,3.97 U22.24@17.13,3.94
  In6.Cu w0.08: v2(16.34,5.29) 16.34,9.15 17.83,10.64 17.83,12.96 20.48,15.61 44.97,15.61 46.62,13.96 49.31,13.96 51.1,12.17 51.1,9.66 51.72,9.04 82.82,9.04 83.86,8 83.86,7.96 83.87,7.95 83.87,5.97 91.37,-1.53 91.37,-1.8 91.4,-1.83 v4(91.4,-11.09)
  In8.Cu w0.08: v1(86,-15.49) 86,-16.575 87.25,-17.825 90.825,-17.825 v1(92.19,-16.46)
  B.Cu w0.08: U68.2@83.43,-15.07 84.94,-15.07 85.36,-15.49 v1(86,-15.49) ; v4(91.4,-11.09) 91.4,-11.52 92.19,-12.31 v1(92.19,-16.46)
FDC_HDSEL#: J13.11 U22.9 | length 71.9
  F.Cu w0.08: v3(24.5,5.38) 24.63,5.25 U22.9@24.63,3.94 ; v3(25.96,7.46) 26.36,7.46 26.62,7.72 27.49,7.72 28.99,9.22 32.67,9.22 32.84,9.39 v3(32.84,13.22)
  In1.Cu w0.08: v3(24.5,5.38) 24.5,5.39 25.96,6.85 v3(25.96,7.46) ; v3(32.84,13.22) 32.89,13.27 34.98,13.27 36.12,14.41 38.38,14.41 38.95,14.98 41.79,14.98 43.53,13.24 45.07,13.24 45.28,13.45 48.51,13.45 48.77,13.71 48.77,14.84 48.55,15.06 v2(48.55,15.56)
  In8.Cu w0.08: v1(51.03,15.93) 51.03,10.17 51.22,9.98 78.21,9.98 v1(78.94,9.25)
  B.Cu w0.08: v2(48.55,15.56) 48.99,16 50.96,16 v1(51.03,15.93)
FDC_IDE7: J11.11 R369.2 U22.20 U42.13 | length 133.1
  F.Cu w0.08: v3(25.4,-25.36) 25.68,-25.36 26.22,-25.9 26.29,-25.9 26.3,-25.91 29.4,-25.91 29.92,-26.43 29.92,-29.7 30.72,-30.5 v3(31.04,-30.5) ; v3(48.06,-30.64) 50.13,-30.64 v3(50.14,-30.65) ; v3(79.86,-28.36) 82.47,-28.36 82.69,-28.58 85.96,-28.58 v4(86.41,-29.03)
  In1.Cu w0.08: v3(19.13,3.94) 19.49,3.58 19.49,2.54 20.41,1.62 20.41,1.02 20.32,0.93 20.32,-3.11 20.51,-3.3 20.51,-7.76 20.17,-8.1 20.16,-8.1 19.715,-8.545 19.715,-11.815 19.5,-12.03 19.5,-13.18 19.94,-13.62 21.79,-13.62 22.21,-14.04 22.21,-14.8 22.35,-14.94 22.35,-15.75 22.6,-16 24.21,-16 24.77,-16.56 24.77,-21.99 25.045,-22.265 25.045,-22.62 24.985,-22.68 24.985,-24.415 25.4,-24.83 v3(25.4,-25.36) ; v3(31.04,-30.5) 31.34,-30.5 31.6,-30.24 31.91,-30.24 32.58,-30.91 34.77,-30.91 35.72,-31.86 37.55,-31.86 38.49,-30.92 41.78,-30.92 42.01,-30.69 43.35,-30.69 43.66,-30.38 43.66,-30.22 43.91,-29.97 44.78,-29.97 44.89,-30.08 46.65,-30.08 47.21,-30.64 v3(48.06,-30.64) ; v3(50.14,-30.65) 51.62,-30.65 52.19,-31.22 52.19,-32.63 v4(52.16,-32.66) v3(54.39,-30.43) ; v4(79.37,-34.1) 79.37,-31.54 79.85,-31.06 79.85,-28.37 v3(79.86,-28.36) 79.86,-24.64 80.53,-23.97 80.53,-22.305 v3(81.61,-21.225)
  In3.Cu w0.08: v4(52.16,-32.66) 52.17,-32.67 63.12,-32.67 63.67,-32.12 68.27,-32.12 68.86,-32.71 75.02,-32.71 75.75,-33.44 76.86,-33.44 77.52,-34.1 v4(79.37,-34.1)
  In8.Cu w0.08: v13(85.4,-22.06) 84.58,-22.88 84.58,-23.56 85.15,-24.13 85.15,-24.6 84.775,-24.975 84.775,-25.405 86.41,-27.04 v4(86.41,-29.03)
  B.Cu w0.08: v13(85.4,-22.06) 85.4,-20.43 86.23,-19.6 R369.2@86.23,-19.06
FDC_INIT#: J13.72 R133.1 U22.72 | length 62.8
  F.Cu w0.08: U22.72@27.18,-11.26 27.18,-9.72 27.24,-9.66 v3(27.24,-9.39) ; v3(27.22,-6.26) 27.83,-5.65 27.83,-2.92 v3(28.22,-2.53) ; v4(64.58,0.14) 64.58,0.44 65.35,1.21 67.9,1.21 68.43,1.74 R133.1@68.43,3.08
  In1.Cu w0.08: v3(27.22,-6.26) 26.12,-7.36 26.12,-9.13 26.38,-9.39 v3(27.24,-9.39) ; v3(28.22,-2.53) 28.2,-2.51 28.2,-1.57 28.31,-1.46 28.31,1.28 28.38,1.35 v2(28.38,1.72)
  In4.Cu w0.08: v2(28.38,1.72) 28.87,1.23 32.43,1.23 32.68,1.48 33.94,1.48 35.45,2.99 37.83,2.99 38.98,1.84 44.46,1.84 45.42,2.8 62.6,2.8 64.58,0.82 v4(64.58,0.14)
  In8.Cu w0.08: v1(64.49,2.45) 64.49,0.23 v4(64.58,0.14)
FDC_IOW: U23.2 U35.58 | length 65.2
  F.Cu w0.08: U23.2@21.56,8.5 21.56,9.37 22.1,9.91 v2(23.14,9.91)
  F.Cu w0.3: v2(9.28,-28.49) 9.51,-28.72 U35.58@9.51,-29.75
  In6.Cu w0.08: v2(9.28,-28.49) 10.9,-28.49 11.36,-28.03 13.41,-28.03 13.88,-28.5 17.83,-28.5 18.29,-28.04 18.29,-26.42 17.95,-26.08 17.48,-26.08 17.16,-25.76 17.16,-23.95 17.04,-23.83 17.04,-19.93 16.77,-19.66 16.77,-17.46 16.41,-17.1 16.08,-17.1 15.77,-16.79 15.77,-6.82 16.36,-6.23 19.44,-6.23 21.51,-4.16 21.51,-1.64 20.89,-1.02 20.89,4.6 21.13,4.84 21.13,5.56 20.71,5.98 20.71,7.87 21.57,8.73 21.57,12.04 22.12,12.59 23.12,12.59 23.66,12.05 23.66,10.43 v2(23.14,9.91)
FDC_IRRX_RXD2: R315.1 U22.86 U26.3 U57.8 | length 119.7
  F.Cu w0.08: v2(26.28,-1.7) 26.28,-4.61 v3(26.34,-4.67) ; v3(28.44,-4.71) U22.86@30.23,-4.71 ; U26.3@44.12,-8.55 44.12,-7.72 44.35,-7.49 49.4,-7.49 v3(50.1,-8.19) ; v4(60.36,-19.57) 60.96,-18.97 60.96,-18.65 v3(60.45,-18.14)
  In1.Cu w0.08: v3(26.34,-4.67) 28.4,-4.67 v3(28.44,-4.71) ; v3(50.1,-8.19) 50.1,-13.26 50.65,-13.81 51.25,-13.81 51.84,-13.22 54.47,-13.22 57.76,-16.51 58.84,-16.51 60.45,-18.12 v3(60.45,-18.14)
  In4.Cu w0.08: v2(26.28,-1.7) 26.91,-1.7 27.18,-1.97 44.76,-1.97 46.29,-0.44 v2(46.29,0.3)
  In6.Cu w0.08: v2(46.29,0.3) 46.29,-0.21 43.25,-3.25 43.25,-4 43.58,-4.33 48.14,-4.33 50.11,-6.3 57.26,-6.3 57.81,-5.75 59.59,-5.75 59.85,-6.01 59.85,-7.05 60.225,-7.425 60.225,-9.145 57.675,-11.695 57.675,-18.595 59.08,-20 59.89,-20 59.9,-19.99 59.94,-19.99 v4(60.36,-19.57)
  In8.Cu w0.08: v1(24.91,-7.02) 24.85,-6.96 24.85,-4.25 25,-4.1 25,-2.98 v2(26.28,-1.7) 26.28,-1.71 ; v1(57.94,-13.12) 55.21,-13.12 54.96,-13.37 54.96,-14.01 55.56,-14.61 55.56,-16.4 55.26,-16.7 55.26,-17.1 55.42,-17.26 58.82,-17.26 v1(59.27,-17.71)
  B.Cu w0.08: R315.1@22.1,-7.57 22.1,-7.43 22.51,-7.02 v1(24.91,-7.02) ; v1(59.27,-17.71) 60.16,-17.71 60.3,-17.85 60.3,-18.15 60.04,-18.41 60.04,-19.25 v4(60.36,-19.57)
FDC_IRTX_TXD2: R183.2 U22.87 U26.2 U57.5 | length 52
  F.Cu w0.08: U26.2@43.47,-8.55 43.47,-7.11 v3(43.45,-7.09) 44.2,-7.09 44.41,-7.3 49.55,-7.3 v3(49.79,-7.06)
  F.Cu w0.2: U22.87@30.23,-4.21 31.27,-4.21 v3(31.31,-4.25)
  In1.Cu w0.08: v3(31.31,-4.25) 31.31,-3.58 32.65,-2.24 34.81,-2.24 34.97,-2.4 36.43,-2.4 36.84,-2.81 36.84,-3.96 38.51,-5.63 38.51,-6.53 39,-7.02 40.27,-7.02 40.83,-7.58 42.96,-7.58 v3(43.45,-7.09) ; v3(50.97,-13.33) 50.39,-12.75 50.39,-7.72 49.81,-7.14 49.81,-7.08 v3(49.79,-7.06) 50.09,-6.76 51.06,-6.76 51.8,-6.02 52.26,-6.02 54.14,-7.9 54.81,-7.9 54.96,-8.05 v4(60.8,-8.05)
  In8.Cu w0.08: v1(60.57,-11.82) 60.57,-11.08 60.8,-10.85 v4(60.8,-8.05)
  B.Cu w0.08: v1(60.57,-11.82) U57.5@63.603,-11.82
FDC_MTR2#: R310.1 U21.121 U22.94 | length 64.3
  F.Cu w0.08: U21.121@-2.68,8.535 -2.68,9.95 v3(-2.36,10.27) ; v3(7.02,18.5) 7.46,18.94 9.86,18.94 10.05,18.75 12.38,18.75 14,17.13 14,16.05 14.84,15.21 v3(15.16,15.21) ; v3(17.74,14.4) 20.99,14.4 21.55,13.84 v3(21.55,12.47) ; v3(26.27,5.2) 26.27,6.26 v3(26.3,6.29) ; v2(26.42,0.19) 27.63,0.19 28.53,-0.71 U22.94@30.23,-0.71
  In1.Cu w0.08: v3(-2.36,10.27) -2.36,10.93 -2.14,11.15 -2.14,12.2 0.02,14.36 6.54,14.36 6.71,14.53 6.71,17.79 7.02,18.1 v3(7.02,18.5) ; v3(15.16,15.21) 16.93,15.21 v3(17.74,14.4) ; v3(21.55,12.47) 21.98,12.47 22.12,12.61 24.45,12.61 26.24,10.82 26.24,6.35 v3(26.3,6.29) ; v3(26.27,5.2) 25.96,4.89 25.96,1.31 26.42,0.85 v2(26.42,0.19)
  In8.Cu w0.08: v1(24.58,4.56) 25.07,4.56 26.16,3.47 26.16,1.05 26.42,0.79 v2(26.42,0.19)
  B.Cu w0.08: v1(24.58,4.56) R310.1@24.58,6.19
FDC_MTR3#: U21.117 U22.97 | length 44.7
  F.Cu w0.08: v3(2.34,9.91) 5.44,9.91 5.79,10.26 5.79,11.93 6.29,12.43 9.33,12.43 10.01,13.11 13.94,13.11 15.26,11.79 20.57,11.79 v3(20.88,12.1) ; v3(28.6,6.27) 28.61,6.26 28.61,5.84 29.71,4.74 v3(29.71,3.46)
  F.Cu w0.25: v3(-0.62,9.92) -0.58,9.88 U21.117@-0.58,8.56
  In1.Cu w0.08: v3(-0.62,9.92) 2.33,9.92 v3(2.34,9.91) ; v3(20.88,12.1) 20.88,12.24 21.5,12.86 24.83,12.86 26.67,11.02 26.67,9.15 27.54,8.28 27.54,7.33 v3(28.6,6.27)
  In1.Cu w0.2: v3(29.71,3.46) 29.51,3.26 29.51,1.51 v3(30.23,0.79)
FDC_PD0: J13.30 U22.69 | length 63.6
  F.Cu w0.08: v3(27.42,-5.34) 27.42,-2.81 28.15,-2.08 v3(28.56,-2.08) ; v3(47.58,8) v3(47.58,9.55)
  In1.Cu w0.08: v3(25.68,-11.26) 25.87,-11.07 25.87,-9.62 25.74,-9.49 25.74,-7.02 v3(27.42,-5.34) ; v3(28.56,-2.08) 28.76,-2.08 29.2,-1.64 29.2,0.62 29.08,0.74 29.08,3.6 29.66,4.18 33.27,4.18 36.375,7.285 37.215,7.285 38.48,8.55 38.48,9.41 39.01,9.94 44.49,9.94 44.885,9.545 47.575,9.545 v3(47.58,9.55) ; v3(47.58,8) 48.11,8 51.67,4.44 59.55,4.44 59.72,4.27 60.8,4.27 60.99,4.46 63.99,4.46 64.13,4.6 v5(64.13,5.33)
  B.Cu w0.08: J13.30@63.74,9.25 63.74,7.49 63.26,7.01 63.26,6.2 v5(64.13,5.33)
FDC_PD1: J13.29 U22.68 | length 64.3
  In1.Cu w0.08: v3(25.18,-11.26) 25.8,-11.88 30.8,-11.88 31.12,-11.56 v2(31.68,-11.56)
  In5.Cu w0.08: v2(31.68,-11.56) 32.27,-10.97 33.35,-10.97 33.98,-10.34 38.73,-10.34 38.98,-10.09 40.26,-10.09 40.7,-10.53 42.16,-10.53 43.46,-11.83 47.2,-11.83 47.47,-11.56 49.44,-11.56 49.84,-11.96 57.4,-11.96 58.68,-13.24 60.11,-13.24 v4(60.53,-12.82)
  In8.Cu w0.08: v4(60.53,-12.82) 61.53,-12.82 61.79,-12.56 61.79,-5.36 64.18,-2.97 64.18,-1.92 61.93,0.33 61.93,6.75 64.43,9.25 v1(64.54,9.25)
FDC_PD2: J13.28 U22.67 | length 75.8
  F.Cu w0.08: v3(24.19,-9.64) 24.68,-10.13 U22.67@24.68,-11.26
  In1.Cu w0.08: v3(24.19,-9.64) 24.19,-7.42 23.33,-6.56 23.33,-3.68 23.05,-3.4 23.05,-0.76 23.28,-0.53 23.97,-0.53 v2(24.44,-1)
  In4.Cu w0.08: v2(24.44,-1) 24.1,-0.66 23.03,-0.66 22.11,0.26 22.11,3.16 23.125,4.175 34.295,4.175 35.85,5.73 37.98,5.73 39.53,7.28 40.48,7.28 40.82,6.94 40.82,2.67 41.2,2.29 44.13,2.29 45.04,3.2 64.94,3.2 65.42,3.68 65.42,5.63 65.08,5.97 v5(64.46,5.97)
  B.Cu w0.08: v5(64.46,5.97) 64.51,6.02 65.1,6.02 65.29,6.21 J13.28@65.29,9.25
FDC_PD3: J13.27 U22.66 | length 64.8
  In1.Cu w0.08: v3(24.18,-11.26) 24.18,-11.61 24.88,-12.31 27.06,-12.31 27.29,-12.08 28.54,-12.08 28.68,-12.22 28.68,-14.12 29.05,-14.49 30.79,-14.49 31.66,-13.62 32.34,-13.62 32.64,-13.32 33.92,-13.32 34.61,-12.63 34.61,-11.8 35.14,-11.27 37.83,-11.27 38.19,-11.63 42.06,-11.63 44.83,-8.86 44.83,-6.14 45.56,-5.41 v4(46,-5.41)
  In5.Cu w0.08: v4(46,-5.41) 46.06,-5.35 46.83,-5.35 47.18,-5 60.35,-5 61.07,-4.28 v4(65.68,-4.28)
  In8.Cu w0.08: v4(65.68,-4.28) 65.545,-4.145 65.545,8.655 v1(66.14,9.25)
FDC_PD4: J13.26 U22.64 | length 72.2
  F.Cu w0.08: v3(22.45,-2.7) 24.89,-2.7 v3(24.9,-2.71) ; v3(22.52,-8.97) 23.045,-9.495 23.045,-10.215 23.18,-10.35 U22.64@23.18,-11.26
  In1.Cu w0.08: v3(22.45,-2.7) 22.45,-3.99 22.8,-4.34 22.8,-7.14 22.27,-7.67 22.27,-8.72 v3(22.52,-8.97) ; v3(24.9,-2.71) 25.39,-2.71 25.9,-2.2 25.9,-0.72 26.14,-0.48 26.37,-0.48 26.93,0.08 26.93,0.7 26.2,1.43 26.2,4.44 v2(26.85,5.09)
  In5.Cu w0.08: v2(26.85,5.09) 26.89,5.13 32.12,5.13 32.55,4.7 34.25,4.7 35.93,3.02 37.87,3.02 39.06,1.83 44.87,1.83 45.53,2.49 47.49,2.49 47.69,2.29 57.58,2.29 58.96,3.67 58.96,6.33 59.28,6.65 62.66,6.65 63.55,5.76 63.55,5.02 64.12,4.45 65.01,4.45 65.49,4.93 65.49,5.82 66.14,6.47 66.86,6.47 v5(66.94,6.39)
  B.Cu w0.08: v5(66.94,6.39) J13.26@66.94,9.25
FDC_PD5: J13.25 U22.63 | length 75.9
  In1.Cu w0.08: v3(22.68,-11.26) 22.68,-9.34 23.1,-8.92 23.1,-4.02 22.84,-3.76 22.84,0.84 v2(23.28,1.28)
  In6.Cu w0.08: v2(23.28,1.28) 23.78,1.78 23.78,2.68 24.74,3.64 24.74,10.36 29.51,15.13 44.58,15.13 46.66,13.05 48.84,13.05 50.18,11.71 50.18,9.11 51.98,7.31 67.09,7.31 67.58,6.82 v5(67.58,6.35)
  B.Cu w0.4: v5(67.58,6.35) 67.74,6.51 J13.25@67.74,9.25
FDC_PD6: J13.76 U22.62 | length 66.2
  F.Cu w0.08: U22.62@22.18,-11.26 22.13,-11.21 22.13,-8.09 23.2,-7.02 v3(24.23,-7.02)
  In1.Cu w0.08: v2(24,-1.44) 23.58,-1.86 23.58,-4.19 24.24,-4.85 24.24,-7.01 v3(24.23,-7.02)
  In4.Cu w0.08: v2(24,-1.44) 24,-1.5 23.65,-1.85 23.65,-2.28 23.75,-2.38 52.59,-2.38 53.57,-3.36 63.31,-3.36 64.97,-1.7 66.73,-1.7 67.2,-2.17 v4(67.2,-2.77)
  B.Cu w0.08: v4(67.2,-2.77) 67.2,-1.44 65.47,0.29 65.47,0.78 65.75,1.06 67.56,1.06 67.74,1.24 J13.76@67.74,2.45
FDC_PD7: J13.24 U22.61 | length 70.9
  F.Cu w0.3: v2(21.54,-10.07) 21.63,-10.16 U22.61@21.63,-11.26
  In5.Cu w0.08: v2(21.54,-10.07) 21.54,-10.38 21.77,-10.61 33.32,-10.61 33.79,-10.14 38.14,-10.14 38.76,-9.52 39.93,-9.52 40.54,-10.13 43.17,-10.13 43.84,-10.8 46.77,-10.8 47.21,-11.24 49.6,-11.24 49.84,-11.48 53.75,-11.48 53.97,-11.7 67.09,-11.7 67.66,-11.13 68.38,-11.13 68.71,-10.8 v4(68.71,-9.88)
  In8.Cu w0.08: v1(68.54,9.25) 68.54,6.06 69,5.6 69,-9.59 v4(68.71,-9.88)
FDC_PE: J13.78 R138.1 U22.58 | length 91.3
  F.Cu w0.08: v3(20.09,-8.7) 19.6,-8.21 19.6,-7.08 19.97,-6.71 25.05,-6.71 25.59,-7.25 25.59,-9.46 25.4,-9.65 v2(25.4,-10.08) ; v3(70.29,1.08) 70.41,1.2 R138.1@70.41,3.08
  In1.Cu w0.08: v3(20.09,-8.7) 20.09,-11.22 v3(20.13,-11.26) ; v3(70.29,1.08) 71.3,0.07 v4(71.86,0.07)
  In4.Cu w0.08: v4(71.86,0.07) 71.86,-0.91 71.6,-1.17 71.6,-3.42 76.39,-8.21 76.39,-10.44 v5(77.19,-11.24)
  In5.Cu w0.08: v2(25.4,-10.08) 25.4,-10.07 25.8,-9.67 34.85,-9.67 35.45,-9.07 39.07,-9.07 39.33,-9.33 40.35,-9.33 41.03,-8.65 41.74,-8.65 42.85,-9.76 44.36,-9.76 45.19,-10.59 49.33,-10.59 50,-11.26 54.05,-11.26 54.27,-11.48 65.71,-11.48 67.76,-9.43 70.58,-9.43 72.39,-11.24 v5(77.19,-11.24)
  In8.Cu w0.08: v1(70.36,0.37) 70.87,0.37 71.17,0.07 v4(71.86,0.07)
  B.Cu w0.08: J13.78@69.29,2.45 69.29,0.81 69.73,0.37 v1(70.36,0.37)
FDC_RDATA#: J13.91 R307.2 U22.14 | length 113
  F.Cu w0.08: v3(21.85,2.31) 22.13,2.59 U22.14@22.13,3.94
  In1.Cu w0.08: v2(21.06,-2.31) 21.44,-2.31 21.85,-1.9 v3(21.85,2.31)
  In6.Cu w0.08: v2(21.06,-2.31) 20.66,-1.91 20.66,2.69 18.28,5.07 18.28,8.71 17.56,9.43 17.56,10.04 18.13,10.61 18.13,12.89 20.59,15.35 44.89,15.35 46.49,13.75 49.18,13.75 50.85,12.08 50.85,9.35 51.77,8.43 72.98,8.43 76.52,4.89 76.52,0.54 75.33,-0.65 75.33,-0.95 76.18,-1.8 v4(76.32,-1.8)
  In8.Cu w0.08: v1(17.1,-7.53) 16.95,-7.38 16.95,-6.32 17.49,-5.78 17.49,-3.75 18.25,-2.99 v1(18.25,-2.22) ; v4(76.32,-1.8) 77.51,-1.8 79.74,0.43 v1(79.74,2.45)
  B.Cu w0.08: v1(18.25,-2.22) 19.87,-2.22 19.96,-2.31 v2(21.06,-2.31)
  B.Cu w0.3: v1(17.1,-7.53) 17.14,-7.49 R307.2@18.12,-7.49
FDC_RI1#: J8.5 R190.1 U22.82 | length 116.1
  F.Cu w0.08: v3(48.81,10.3) 48.81,8.65 v3(48.83,8.63) ; v3(55.69,7.67) 55.69,7.98 J8.5@55.79,8.08 ; v3(76.73,8.76) 76.74,8.75 v3(76.74,4.81)
  F.Cu w0.5: v4(85.24,-32.19) 85.495,-32.445 R190.1@86.2,-32.445
  In1.Cu w0.08: v3(30.23,-6.71) 30.23,-4.58 29.08,-3.43 27.99,-3.43 27.7,-3.14 27.7,-1.23 27.93,-1 27.93,-0.22 27.21,0.5 27.21,1.83 27.48,2.1 27.48,2.4 27.8,2.72 28.54,2.72 28.88,3.06 28.88,3.74 29.54,4.4 32.9,4.4 34.35,5.85 34.35,8.61 36.16,10.42 46.82,10.42 46.93,10.31 48.8,10.31 v3(48.81,10.3) ; v3(48.83,8.63) 49.83,7.63 51.28,7.63 51.56,7.91 55.07,7.91 55.31,7.67 v3(55.69,7.67) 57,7.67 57.58,8.25 60.82,8.25 61.4,7.67 62.25,7.67 63.34,8.76 v3@76.71,8.76 ; v3(76.74,4.81) 78.29,3.26 78.29,-1.79 83.23,-6.73 83.23,-10.06 82.91,-10.38 82.91,-11.74 83.18,-12.01 83.18,-13.87 84.87,-15.56 84.87,-18.05 85.07,-18.25 85.07,-21.89 84.63,-22.33 84.63,-24.07 84.91,-24.35 84.91,-25.53 85.3,-25.92 85.3,-28.87 84.86,-29.31 84.86,-31.81 v4(85.24,-32.19)
FDC_RI2#: J13.81 R311.1 U22.84 | length 71.8
  F.Cu w0.08: v5(69.09,-12.26) v5@69.11,-12.26
  F.Cu w0.2: U22.84@30.23,-5.71 31.31,-5.71 v3(31.4,-5.8)
  In1.Cu w0.08: v3(31.4,-5.8) 30.79,-6.41 30.79,-7.35 30.07,-8.07 v2(28.65,-8.07) 28.34,-8.38 28.34,-8.93 27.78,-9.49 27.78,-11.42 28.05,-11.69 29.34,-11.69 29.84,-11.19 31.02,-11.19 31.06,-11.15 33.65,-11.15 34.6,-10.2 38.96,-10.2 39.47,-9.69 v4(40.78,-9.69)
  In3.Cu w0.08: v4(40.78,-9.69) 43.02,-11.93 68.76,-11.93 v5(69.09,-12.26)
  In8.Cu w0.08: v1(70.02,-8.33) 70.08,-8.27 70.08,-0.49 69.85,-0.26 69.85,0.61 v1(71.69,2.45)
  B.Cu w0.08: v2(28.65,-8.07) 31.05,-8.07 31.19,-7.93 R311.1@31.19,-7.53 ; v5(69.09,-12.26) 69.09,-10.6 69.24,-10.45 69.24,-8.56 69.47,-8.33 v1(70.02,-8.33)
FDC_RTS1#: R193.1 U22.79 U64.5 | length 96.1
  F.Cu w0.08: v2(27.78,-8.76) 28.275,-8.265 28.275,-7.815 28.47,-7.62 28.83,-7.62 29.42,-8.21 U22.79@30.23,-8.21
  F.Cu w0.5: v4(89.21,-36.64) 89.51,-36.34 R193.1@89.51,-35.485
  In5.Cu w0.08: v2(27.78,-8.76) 28.14,-9.12 32.07,-9.12 32.79,-8.4 33.6,-8.4 34.25,-7.75 39.29,-7.75 39.63,-7.41 40.21,-7.41 41.03,-8.23 42.12,-8.23 42.94,-9.05 42.98,-9.05 43.27,-9.34 44.51,-9.34 45.3,-10.13 49.07,-10.13 49.89,-9.31 51.81,-9.31 51.95,-9.17 54.06,-9.17 55.96,-11.07 65.41,-11.07 67.56,-8.92 76.46,-8.92 76.98,-9.44 79.76,-9.44 v4(80.29,-8.91)
  In6.Cu w0.08: v4(80.29,-8.91) 81.32,-9.94 81.32,-16.695 82.375,-17.75 82.375,-18.365 81.61,-19.13 81.61,-25.1 81.325,-25.385 81.325,-28.515 82.9,-30.09 v5(82.9,-30.13) 82.9,-31.41 88.13,-36.64 v4(89.21,-36.64)
  B.Cu w0.08: v5(82.9,-30.13) 82.91,-30.12 U64.5@82.91,-28.627
FDC_RTS2#: J13.83 U22.89 | length 51.9
  F.Cu w0.08: U22.89@30.23,-3.21 31.27,-3.21 31.36,-3.12 v3(31.36,-2.22)
  In1.Cu w0.08: v3(31.36,-2.22) 31.36,-2.19 30.9,-1.73 30.9,0.67 31.78,1.55 34.06,1.55 35.56,3.05 40.93,3.05 41.43,2.55 45.05,2.55 45.35,2.85 53.72,2.85 54.08,3.21 65.46,3.21 65.68,3.43 70.88,3.43 73.41,0.9 v4(73.41,0.86)
  B.Cu w0.4: J13.83@73.34,2.45 73.34,0.93 v4(73.41,0.86)
FDC_RXD1: J8.10 R194.1 U22.76 | length 104.9
  F.Cu w0.08: J8.10@49.49,8.08 49.49,6.1 50.12,5.47 v3(50.12,1.47) 50.12,0.82 50.4,0.54 v3(50.4,0) ; v3(58.96,-4.65) 63,-4.65 63.08,-4.57 63.83,-4.57 64.24,-4.98 69.94,-4.98 71.32,-3.6 v3(72.68,-3.6) ; v3(83.9,-15.18) 86.36,-15.18 v3(86.42,-15.24)
  In1.Cu w0.08: v3(30.23,-9.81) 30.57,-9.81 30.61,-9.77 33.97,-9.77 34.85,-8.89 38.2,-8.89 39.53,-7.56 40.3,-7.56 40.68,-7.94 43.41,-7.94 43.94,-7.41 43.94,-5.37 42.93,-4.36 42.93,-0.92 43.37,-0.48 44.45,-0.48 46.4,1.47 v3(50.12,1.47) ; v3(50.4,0) 50.4,-0.01 53.35,-2.96 55.47,-2.96 55.82,-3.31 57.62,-3.31 v3(58.96,-4.65) ; v3(72.68,-3.6) 73.28,-3.6 73.75,-3.13 77.97,-3.13 81.54,-6.7 81.54,-12.82 v3(83.9,-15.18) ; v3(86.42,-15.24) 86.46,-15.28 86.46,-21.69 86.59,-21.82 86.6,-21.82 86.9,-22.12 86.9,-26.14 90.09,-29.33 90.09,-32.24 v3(90.29,-32.44)
FDC_SLCT: J13.23 R140.2 U22.57 | length 77.7
  F.Cu w0.08: U22.57@19.63,-11.26 19.63,-10.13 20.15,-9.61 21.06,-9.61 21.62,-9.05 21.62,-7.55 22.15,-7.02 v3(22.42,-7.02) ; R140.2@69.57,8.44 69.66,8.44 70.17,7.93 v4(70.17,6.47)
  In1.Cu w0.08: v3(22.42,-7.02) 22.44,-7 22.44,-4.45 22.15,-4.16 22.15,1.87 v2(22.65,2.37)
  In4.Cu w0.08: v2(22.65,2.37) 22.65,3.14 23.41,3.9 34.38,3.9 36.02,5.54 38.23,5.54 39.79,7.1 40.28,7.1 40.62,6.76 40.62,2.4 40.91,2.11 44.33,2.11 45.19,2.97 65.99,2.97 66.68,3.66 67.64,3.66 68.84,4.86 68.84,5.06 70.17,6.39 v4(70.17,6.47)
  B.Cu w0.08: J13.23@69.34,9.25 69.34,7.3 v4(70.17,6.47)
FDC_SLCTIN#: J13.74 R132.1 U22.71 | length 63.4
  F.Cu w0.08: U22.71@26.68,-11.26 26.68,-9.5 27.11,-9.07 27.46,-9.07 27.92,-9.53 v3(28.14,-9.53) ; v3(67.59,2.83) 67.59,4.49 v4(68.19,5.09) 68.52,5.42 68.52,6.99 68.08,7.43 R132.1@67.61,7.43
  In1.Cu w0.08: v3(28.14,-9.53) 30.71,-9.53 30.76,-9.58 33.8,-9.58 34.69,-8.69 38.07,-8.69 39.49,-7.27 40.26,-7.27 40.76,-7.77 43.22,-7.77 43.77,-7.22 43.77,-5.62 42.74,-4.59 42.74,-0.8 43.57,0.03 43.57,0.33 45.62,2.38 53.82,2.38 54.3,2.86 67.56,2.86 v3(67.59,2.83)
  In8.Cu w0.08: v1(66.09,2.45) 66.09,3.37 67.81,5.09 v4(68.19,5.09)
FDC_STEP#: J13.94 U22.6 | length 75
  F.Cu w0.08: U22.6@26.13,3.94 26.13,4.87 25.96,5.04 25.96,6.42 26.31,6.77 28.64,6.77 29.25,7.38 31.68,7.38 v3(31.75,7.45) ; v3(33.18,12.88) 33.2,12.86 33.2,10.17 33.43,9.94 v3(33.43,9.89) ; v3(79.32,9.18) 79.32,6.54 v5(79.39,6.47)
  In1.Cu w0.08: v3(31.75,7.45) 31.77,7.45 32,7.22 33.03,7.22 33.66,7.85 33.66,9.66 v3(33.43,9.89) ; v3(33.18,12.88) 33.18,12.26 33.55,11.89 38.85,11.89 40.17,13.21 42.03,13.21 43.35,11.89 49.01,11.89 50.39,10.51 50.39,9.6 50.99,9 53.45,9 53.63,9.18 57.26,9.18 57.38,9.06 57.83,9.06 58.03,9.26 78.51,9.26 78.57,9.2 79.3,9.2 v3(79.32,9.18)
  B.Cu w0.08: v5(79.39,6.47) 79.39,5.33 80.18,4.54 81.7,4.54 82.14,4.1 J13.94@82.14,2.45
FDC_STROBE#: J13.31 R137.1 U22.75 | length 64.8
  F.Cu w0.08: v3(60.11,4.63) 60.11,2.11 v3(60.12,2.1)
  F.Cu w0.3: U22.75@28.73,-11.26 28.73,-10.19 v3(28.75,-10.17)
  In1.Cu w0.08: v3(28.75,-10.17) 29.18,-10.6 31.15,-10.6 31.3,-10.75 33.44,-10.75 35.09,-9.1 38.86,-9.1 39.5,-8.46 43.26,-8.46 44.13,-7.59 44.13,-5.27 43.12,-4.26 43.12,-1.09 43.53,-0.68 44.55,-0.68 44.95,-0.28 46.38,-0.28 47.8,1.14 50.34,1.14 50.72,1.52 50.72,1.94 50.99,2.21 53.54,2.21 53.95,1.8 54.33,1.8 54.63,2.1 v3(60.12,2.1) ; v3(60.11,4.63) 63.03,4.63 63.57,5.17 63.57,6.26 63.4,6.43 v3(63.4,7.11) 63.76,7.47 65.05,7.47 65.96,6.56 v5(65.96,5.51)
  In8.Cu w0.08: v1(62.89,9.25) 63.37,9.73 66.48,9.73 66.91,9.3 66.91,7.85 65.96,6.9 v5(65.96,5.51)
FDC_TRK0#: J13.9 R124.2 U22.11 | length 100.6
  F.Cu w0.08: v3(23.54,9.25) 26.54,9.25 26.88,8.91 v3(27.98,8.91) ; v3(41,12.13) 44.12,9.01 44.67,9.01 44.68,9 44.73,9 45.05,8.68 45.05,8.41 v3(45.03,8.39) 44.98,8.39 44.67,8.08 42.03,8.08 40.83,6.88 40.83,4.59 41.35,4.07 41.35,2.26 v3(41.93,1.68) ; v3(57.6,9.38) 57.61,9.37 v3(57.61,6.49) ; v3(80.23,9.24) 80.23,6.48 v5(80.26,6.45)
  In1.Cu w0.08: v3(23.54,9.25) 23.54,9.23 22.29,7.98 22.29,5.88 21.84,5.43 21.84,4.78 22.32,4.3 23.38,4.3 23.63,4.05 v3(23.63,3.94) ; v3(27.98,8.91) 30.53,8.91 33.32,11.7 40.57,11.7 v3(41,12.13) ; v3(32.36,-1.61) 35.04,-1.61 35.65,-2.22 41.03,-2.22 41.93,-1.32 v3(41.93,1.68) ; v3(45.03,8.39) 45.11,8.47 47.98,8.47 49.24,7.21 51.38,7.21 51.67,6.92 54.5,6.92 54.93,6.49 v3(57.61,6.49) ; v3(57.6,9.38) 57.69,9.47 58.81,9.47 58.83,9.49 79.53,9.49 79.78,9.24 v3(80.23,9.24)
  B.Cu w0.08: v5(80.26,6.45) 80.54,6.73 J13.9@80.54,9.3
FDC_TXD1: R188.1 U22.77 U64.2 | length 92.5
  F.Cu w0.08: v2(28.72,-8.74) 29.19,-9.21 U22.77@30.23,-9.21 ; v4(85.86,-35.7) 86.93,-35.7 87.145,-35.485 R188.1@88.51,-35.485
  In5.Cu w0.08: v2(28.72,-8.74) 29.67,-7.79 29.67,-7.78 32.54,-7.78 32.76,-8 33.27,-8 33.71,-7.56 39.15,-7.56 39.56,-7.15 40.3,-7.15 41.19,-8.04 42.35,-8.04 43.4,-9.09 44.55,-9.09 45.37,-9.91 48.9,-9.91 49.86,-8.95 54.22,-8.95 56.15,-10.88 65.25,-10.88 67.39,-8.74 76.66,-8.74 77.08,-9.16 79.13,-9.16 v4(79.38,-8.91)
  In6.Cu w0.08: v4(79.38,-8.91) 80.38,-9.91 80.38,-16.93 79.675,-17.635 79.675,-19.925 80.55,-20.8 80.55,-25.47 80.94,-25.86 v4(80.94,-30.38)
  In8.Cu w0.08: v4(80.94,-30.38) 80.93,-30.39 80.93,-32.79 83.84,-35.7 v4(85.86,-35.7)
  B.Cu w0.08: v4(80.94,-30.38) 80.96,-30.36 U64.2@80.96,-28.627
FDC_TXD2_EN: R8.1 U2.5 U57.6 | length 176.3
  F.Cu w0.4: v3(-53.59,53.64) -53.53,53.7 R8.1@-53.53,54.93
  In1.Cu w0.08: v3(-53.59,53.64) -53.27,53.64 -49.35,49.72 -49.35,45.08 -47.86,43.59 -47.86,34.8 v2(-47.87,34.79)
  In5.Cu w0.08: v2(-47.87,34.79) -47.9,34.82 -47.9,35.65 -47.08,36.47 -20.47,36.47 -19.06,35.06 5.39,35.06 9.46,30.99 9.46,21.73 13.94,17.25 13.94,16.7 14.48,16.16 44.52,16.16 46.91,13.77 49.45,13.77 51.11,12.11 51.11,10.57 52.42,9.26 63.25,9.26 64.89,7.62 v5(64.89,6.52)
  In8.Cu w0.08: v1(63.602,-12.47) 65.19,-10.883 65.19,-3.62 65.34,-3.47 65.34,6.07 v5(64.89,6.52)